# Allegro board MY_TEST731.brd
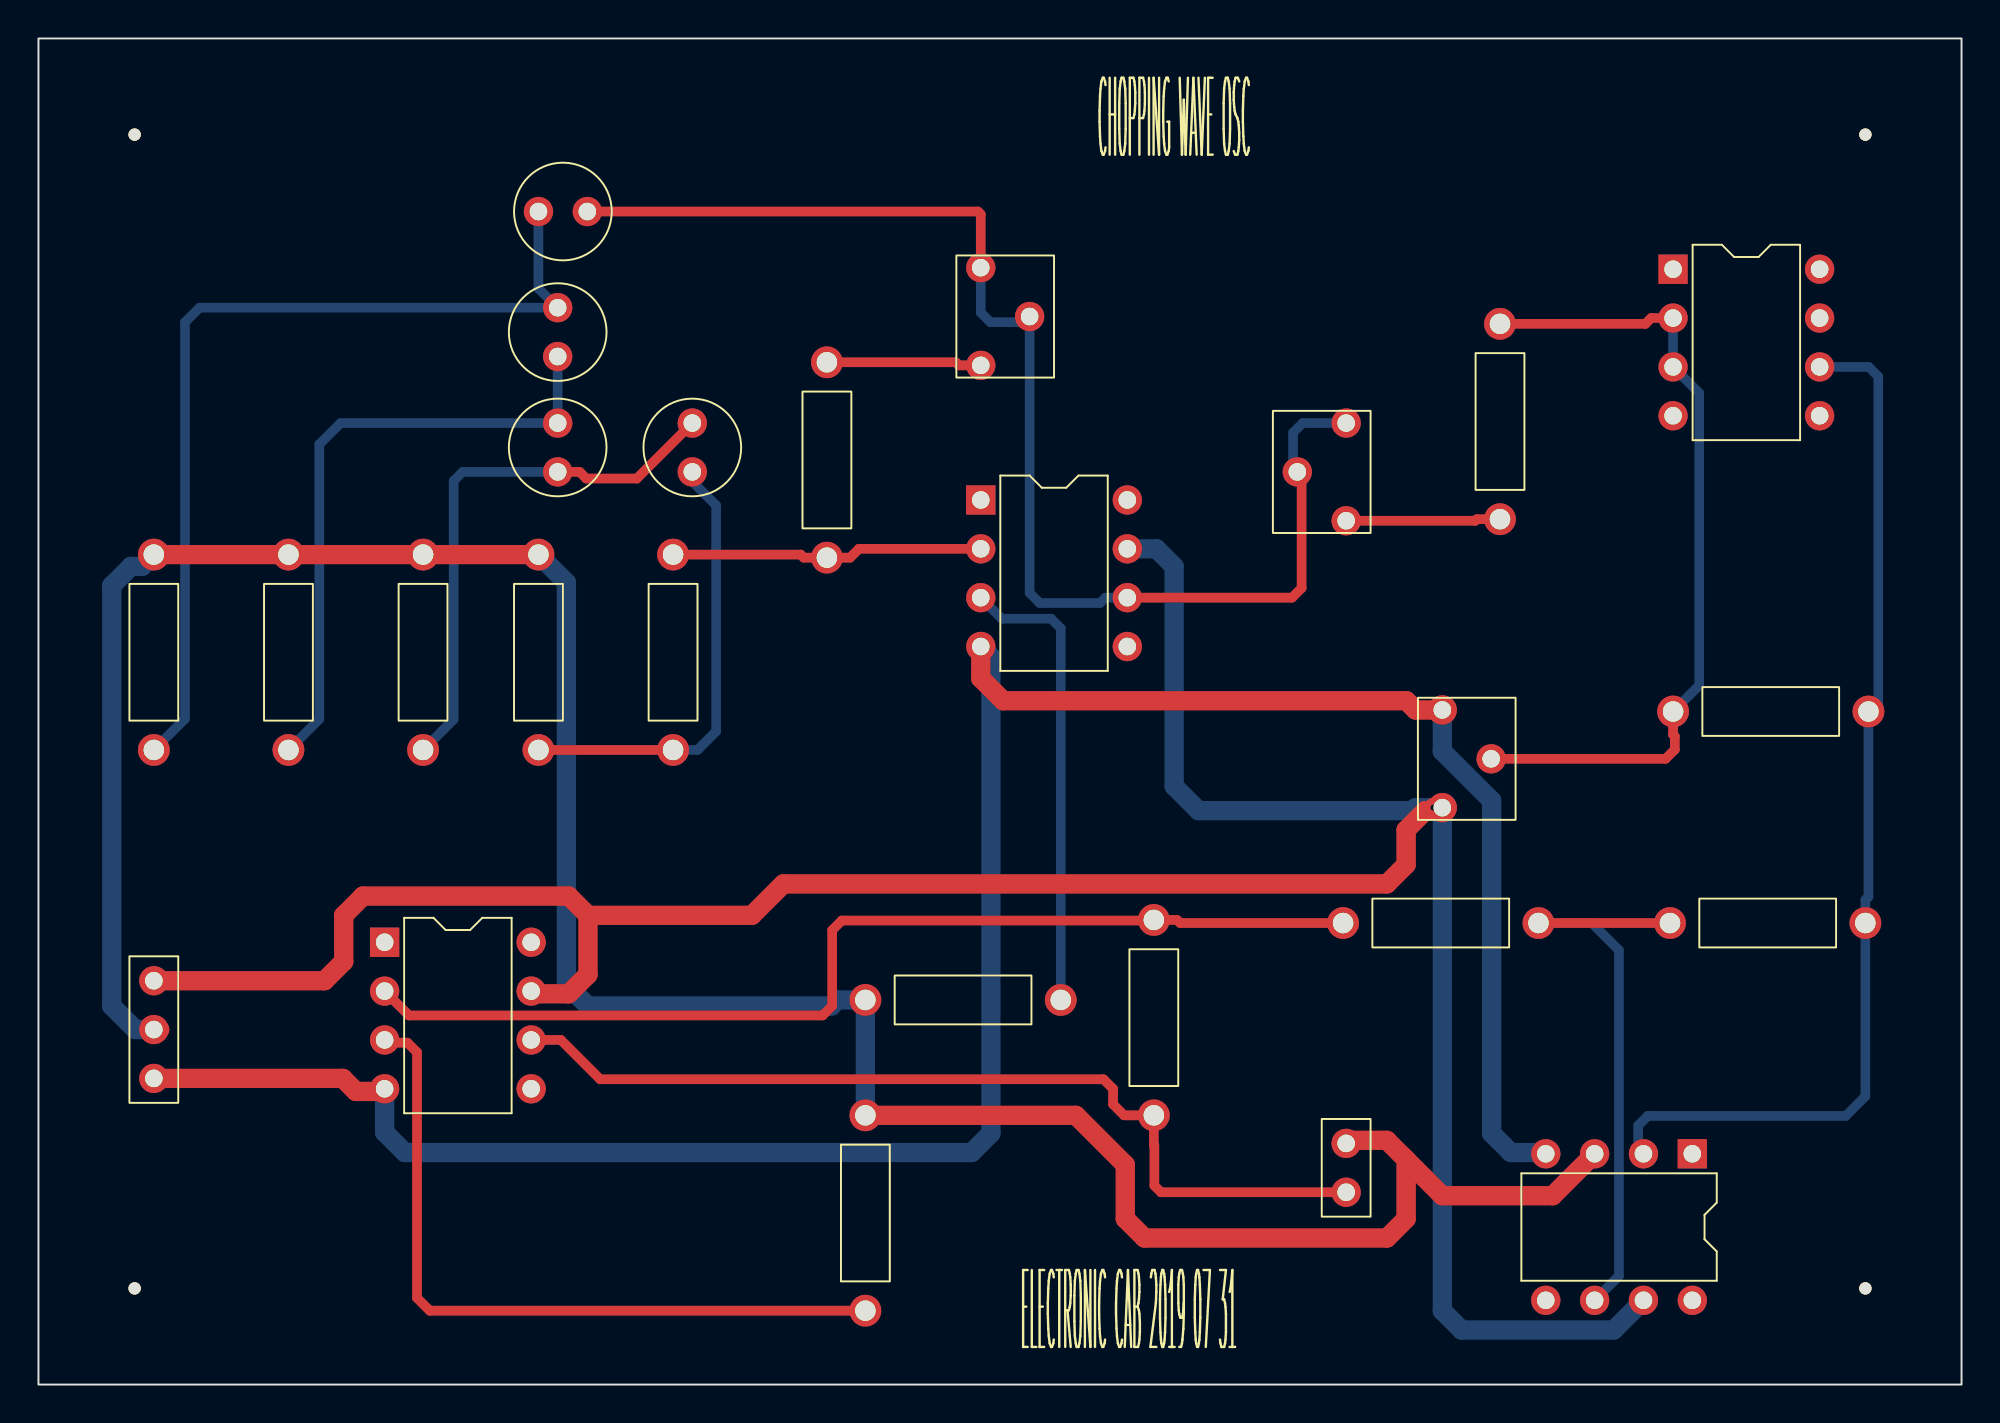
[diagram p0: board, top side]
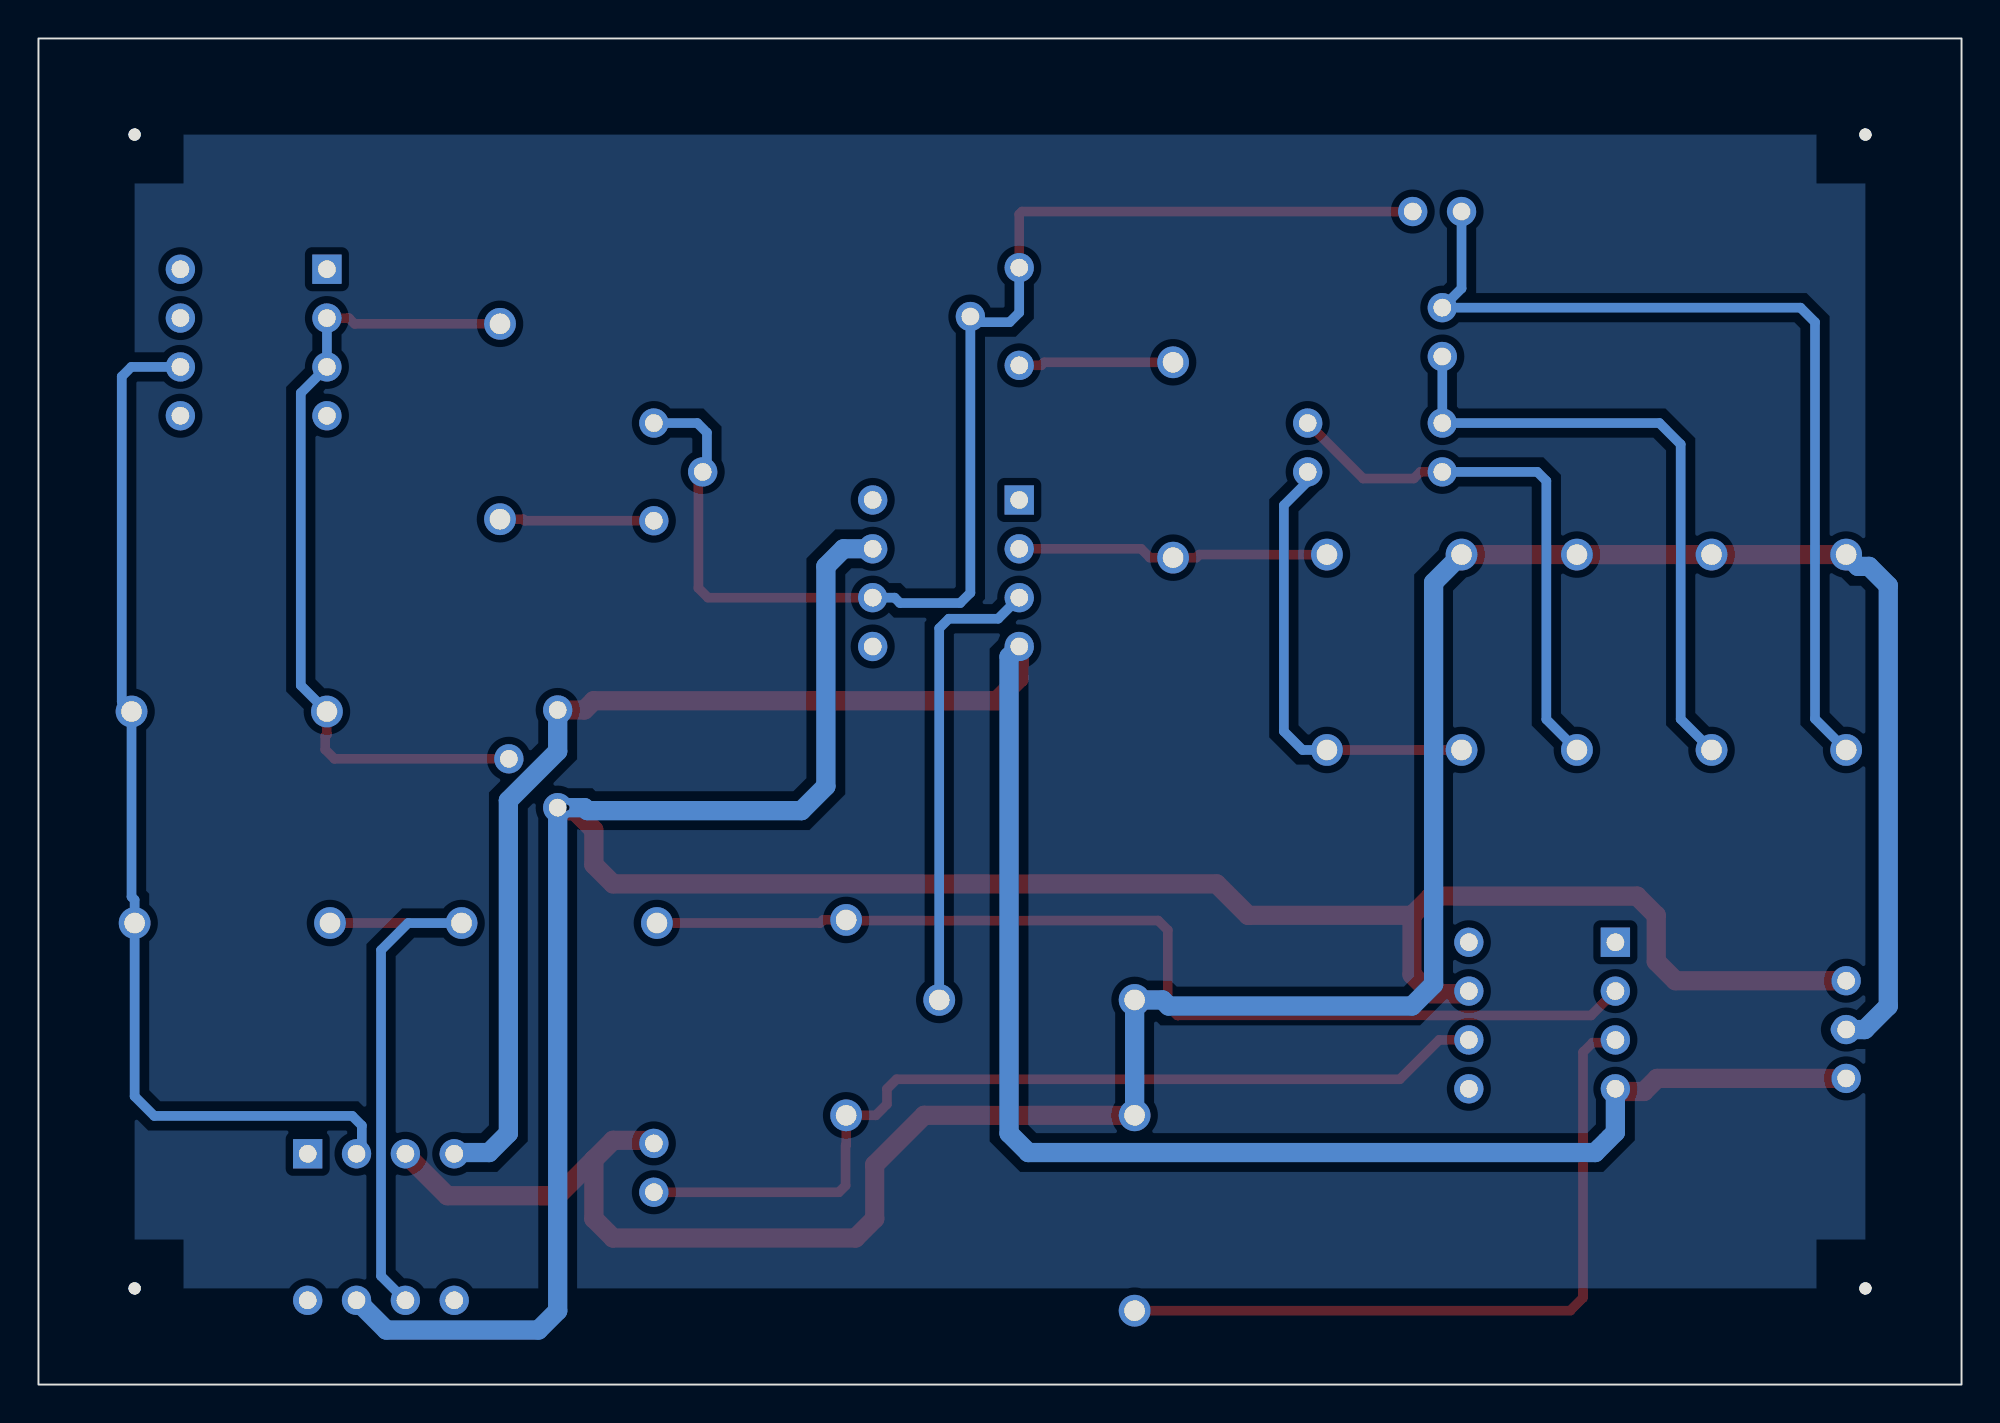
[diagram p1: board, bottom side, seen from below]

Outline 100 x 70 mm; copper layers: TOP, BOTTOM. Coordinates in mm from the lower left corner of the outline.
Outline path: rectangle 0,0 100,70

## Design rules (mm)
net group POWERNETS: nets +12V -12V GND V+ V-
nets with their own width: min track width 0.5; nets N00325 N00339 N00343 N00347 N00356 N00360 N00366 N00467 N01256 N02415 N02449 N02501 N003191 OUT SIG

## Placement (name value [footprint] x y rotation side)
C1  0.001uF  [CAP196]  26 61 270 top
C2  1n  [CAP196]  27 56 180 top
C3  1n  [CAP196]  27 50 180 top
C4  1n  [CAP196]  34 50 180 top
J1  CON3  [JUMPER3]  6 21 270 top
J2  CON2  [JUMPER2]  68 10 90 top
NOREF  -  [unnamed]  5 5 0 top
NOREF#2  -  [#2]  100 0 90 top
NOREF#3  -  [unnamed]  5 65 0 top
NOREF#4  -  [#2]  0 70 0 top
NOREF#5  -  [unnamed]  95 65 0 top
NOREF#6  -  [unnamed]  95 5 0 top
R1  10K  [RES400]  85 35 270 top
R2  15K  [RES400]  41 43 0 top
R3  10K  [RES400]  33 33 0 top
R4  20K  [RES400]  76 45 0 top
R5  4.7K  [RES400]  6 33 0 top
R6  4.7K  [RES400]  13 33 0 top
R7  4.7K  [RES400]  20 33 0 top
R8  4.7K  [RES400]  26 33 0 top
R9  1K  [RES400]  43 20 270 top
R10  8.2K  [RES400]  95 24 90 top
R11  10K  [RES400]  58 14 0 top
R12  2.2K  [RES400]  78 24 90 top
R13  5.1K  [RES400]  43 14 180 top
U1  LF356  [DIP8_3]  49 46 0 top
U2  LF356  [DIP8_3]  85 58 0 top
U3  LF356  [DIP8_3]  86 12 270 top
U4  LF356  [DIP8_3]  18 23 0 top
VR1  470K  [RESADJ]  49 53 180 top
VR2  100K  [RESADJ]  68 50 0 top
VR3  10K  [RESADJ]  73 30 180 top

## Library data of the parts
C1-C4 = C: Tolerance: ***; User Part Number: ***
J1 = CON3_0: User Part Number: ***
J2 = CON2: User Part Number: ***
R1-R13 = R: Tolerance: ***; User Part Number: ***
U1-U4 = LF356: Tolerance: ***; User Part Number: ***
VR1-VR3 = POT: Tolerance: ***; User Part Number: ***

## Footprints (pads in the part's own frame, mm; a bottom-side part is the same pattern mirrored in y, then rotated)
CAP196
  round 1.524 hole 0.914: 1(0,0) 2(0,2.54)
DIP8_3
  rect 1.524x1.524 hole 0.914: 1(0,0)
  round 1.524 hole 0.914: 2(0,-2.54) 3(0,-5.08) 4(0,-7.62) 5(7.62,-7.62) 6(7.62,-5.08) 7(7.62,-2.54) 8(7.62,0)
JUMPER2
  round 1.524 hole 0.914: 1(0,0) 2(2.54,0)
JUMPER3
  round 1.524 hole 0.914: 1(0,0) 2(2.54,0) 3(5.08,0)
RES400
  round 1.651 hole 1.067: 1(0,0) 2(0,10.16)
RESADJ
  round 1.524 hole 0.914: 1(0,0) 2(-2.54,-2.54) 3(0,-5.08)
unnamed
  round 0.635 hole 3.175 unplated: (0,0)

## Nets
+12V: J1.1 U1.7 U3.7 U4.7 VR3.1
-12V: J1.3 U1.4(V-) U3.4(V-) U4.4(V-) VR3.3
GND: J1.2 J2.2 R5.2 R6.2 R7.2 R8.2 R9.1 R13.1 U3.3
OUT: J2.1 R11.1 U4.6
SIG: R1.2 R10.1 U2.6 U3.2
V+: U2.7
V-: U2.4(V-)
N00325: C1.1 C2.1 R5.1
N00339: C2.2 C3.1 R6.1
N00343: C3.2 C4.1 R7.1
N00347: C4.2 R3.1 R8.1
N00356: R2.1 R3.2 U1.2
N00360: R2.2 VR1.1
N00366: C1.2 U1.6 VR1.2(WIPER) VR1.3 VR2.1 VR2.2(WIPER)
N00467: R9.2 U1.3
N01256: R1.1 R4.2 U2.2 U2.3 VR3.2(WIPER)
N02415: R10.2 R12.1 U3.6
N02449: R11.2 R12.2 U4.2
N02501: R13.2 U4.3
N003191: R4.1 VR2.3

Pads without a net: U1 1 5 8; U2 1 5 8; U3 1 5 8; U4 1 5 8

## Via types
v1: diameter 0.61, hole 0.33, TOP to BOTTOM, 2 vias

## Routing (per net, layer and track width the routed paths; a pad name or vN(x,y) marks a point on that pad's centre or on a via; arc(x,y) is an arc through that point)
+12V: length 146.5
  TOP w1: J1.1 14.88,21 15.88,22 15.88,24.4 16.88,25.4 27.57,25.4 28.57,24.4 ; U4.7 25.76,20.32 27.57,20.32 28.57,21.32 28.57,24.4 ; 28.57,24.4 37.1,24.4 38.73,26.04 70.12,26.04 71.12,27.04 71.12,28.84 72.12,29.84 72.39,29.84 v1(72.55,30)
  BOTTOM w1: U3.7 81.92,2.83 74,2.83 73,3.83 VR3.1 v1(72.55,30) 71.61,30 71.45,29.84 60.33,29.84 59.05,31.11 59.05,42.55 58.14,43.46 U1.7
-12V: length 125.2
  TOP w1: U1.4 49,36.73 50.16,35.56 71.13,35.56 71.61,35.08 VR3.3 ; U4.4 17.86,15.24 16.51,15.24 15.83,15.92 J1.3
  BOTTOM w1: U3.4 78.31,12.06 76.56,12.06 75.56,13.06 75.56,30.37 73,32.94 VR3.3 ; U4.4 18,13.12 19.05,12.06 48.53,12.06 49.53,13.06 49.53,37.85 U1.4
GND: length 144.1
  TOP w1: J1.2 v1(6.3,18.46) ; R13.1 53.95,14 56.52,11.43 56.52,8.62 57.52,7.62 70.12,7.62 71.12,8.62 71.12,11.7 ; R8.2 R7.2 R6.2 R5.2 ; J2.2 68.16,12.7 70.12,12.7 71.12,11.7 ; U3.3 78.74,9.82 73,9.82 71.12,11.7
  BOTTOM w1: R13.1 R9.1 41.55,20 41.23,19.68 28.57,19.68 27.45,20.81 27.45,41.71 R8.2 ; v1(6.3,18.46) J1.2 5.04,18.46 3.81,19.68 3.81,41.55 4.81,42.55 5.38,42.55 R5.2
OUT: length 48.3
  TOP w0.5: U4.6 27.16,17.92 29.21,15.88 55.38,15.88 55.88,15.38 55.88,14.58 56.46,14 R11.1 58,12.46 58.03,12.43 58.03,10.35 58.38,10 J2.1
SIG: length 55
  BOTTOM w0.5: U2.6 95.17,52.92 95.67,52.42 95.67,35.51 R1.2 95.16,25.36 95,25.2 R10.1 95,14.99 93.98,13.97 83.69,13.97 83.19,13.47 83.19,12.28 U3.2
N00325: length 48
  BOTTOM w0.5: R5.1 7.62,34.62 7.62,55.24 8.38,56 C2.1 26,57 C1.1
N00339: length 32.9
  BOTTOM w0.5: R6.1 14.61,34.6 14.61,48.9 15.71,50 C3.1 C2.2
N00343: length 28.6
  TOP w0.5: C3.2 28.14,47.46 28.48,47.12 31.11,47.12 C4.1
  BOTTOM w0.5: R7.1 21.59,34.59 21.59,46.99 22.06,47.46 C3.2
N00347: length 23.6
  TOP w0.5: R8.1 R3.1
  BOTTOM w0.5: C4.2 34,46.96 35.24,45.72 35.24,33.97 34.27,33 R3.1
N00356: length 16.3
  TOP w0.5: U1.2 42.66,43.46 42.2,43 R2.1 39.8,43 39.64,43.16 R3.2
N00360: length 8.1
  TOP w0.5: R2.2 47.7,53.16 47.86,53 VR1.1
N00366: length 68.8
  TOP w0.5: VR2.2 65.69,47.23 65.69,41.42 65.19,40.92 U1.6 ; C1.2 48.85,61 49,60.85 VR1.3
  BOTTOM w0.5: VR1.3 49,55.74 49.5,55.24 51.24,55.24 VR1.2 51.54,41.17 52.07,40.64 55.2,40.64 55.48,40.92 U1.6 ; VR2.2 65.24,47.68 65.24,49.5 65.74,50 VR2.1
N00467: length 24.1
  BOTTOM w0.5: U1.3 50.09,39.83 52.66,39.83 53.16,39.33 R9.2
N01256: length 42.5
  TOP w0.5: R1.1 85,33.8 85.09,33.71 85.09,33.02 84.61,32.54 VR3.2 ; R4.2 83.56,55.16 83.86,55.46 U2.2
  BOTTOM w0.5: U2.2 U2.3 86.36,51.56 86.36,36.36 R1.1
N02415: length 30.3
  TOP w0.5: R12.1 R10.2
  BOTTOM w0.5: U3.6 82.19,5.65 82.19,22.59 80.78,24 R12.1
N02449: length 54.8
  TOP w0.5: R12.2 59.36,24 59.2,24.16 R11.2 57.97,24.13 41.77,24.13 41.27,23.63 41.27,19.69 40.77,19.19 19.27,19.19 U4.2
N02501: length 38.3
  TOP w0.5: U4.3 18.14,17.78 19.18,17.78 19.68,17.28 19.68,4.5 20.35,3.84 R13.2
N003191: length 8
  TOP w0.5: R4.1 74.8,45 74.72,44.92 VR2.3

## Copper pours and planes (outline as drawn; the poured copper is in the pictures)
Net_1 on BOTTOM: 95,5 95,65 5,65 5,5

## Text on the board
Ref Des/Silkscreen Top: ELECTRONIC CAB 2019 07 31 | CHOPPING WAVE OSC
DIMENSION: FIGURE | FINISHED_SIZE | 0.33 | 0.914 | 1.067 | 3.175 | DRILL CHART: TOP to BOTTOM | ALL UNITS ARE IN MILLIMETERS | PLATED | NON-PLATED | QTY | 9 | 54 | 26 | 4
